# EAGLE board E-Piano-SM (EAGLE 9.4.0)
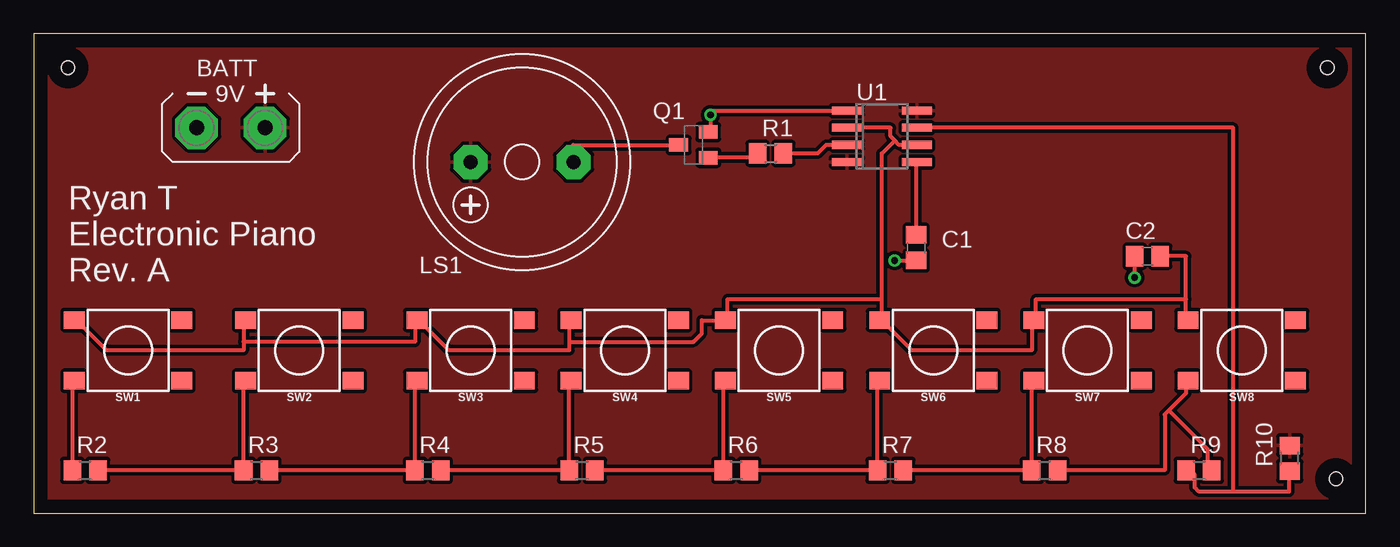
[diagram p0: board, top side]
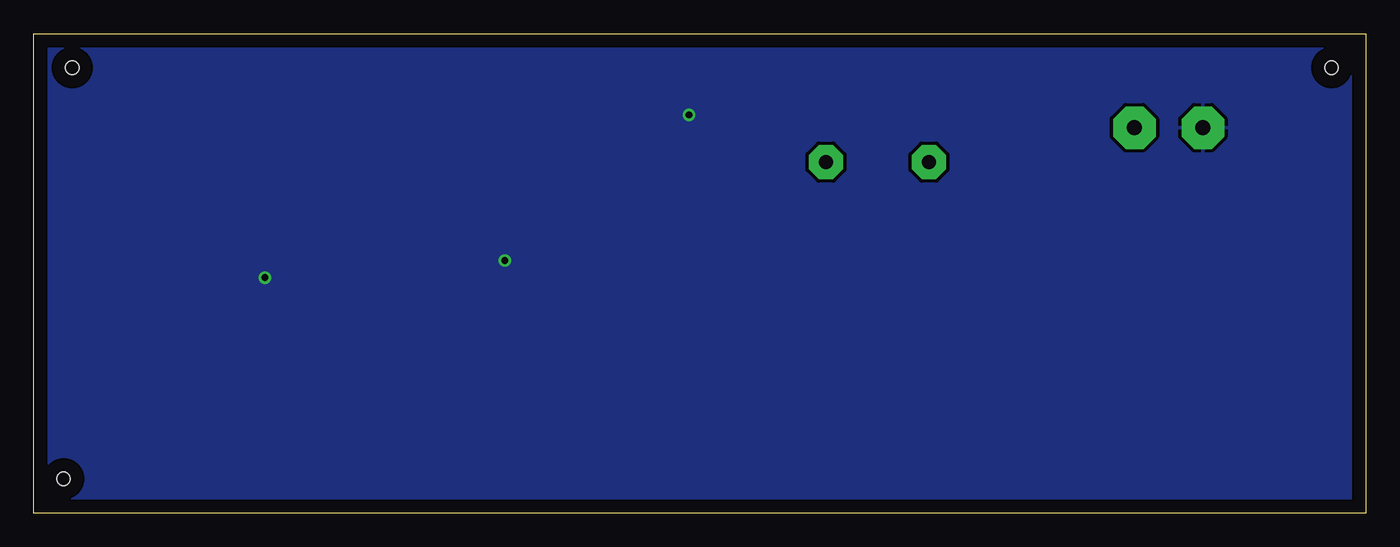
[diagram p1: board, bottom side, seen from below]

Size 98.73 x 35.55 mm. Coordinates in mm from the lower left corner, seen from the top.
Outline: 0,0 98.73,0 98.73,35.55 0,35.55 0,0
Copper layers (1*16): Top 0.035mm / dielectric 1.5mm / Bottom 0.035mm
Design rules "default": minimum track width 6mil, minimum drill 0.35mm, track to track 6mil, track to pad 6mil, pad to pad 6mil, via to via 6mil, smd to smd 6mil, copper to edge 40mil, drill to drill 6mil, minimum pad ring 10mil, minimum via ring 8mil, stop-mask expansion 4mil, vias tented up to drill 0mil, thermal gap 10mil
Net classes: 0 default: width 0.305 mm, drill 0.508 mm, clearance 0.254 mm
Holes 1 mm at 2.54,33.02 96.52,2.54 95.89,33.02

## Footprints (pad centres in the part's own frame; a part is rotated, then mirrored left to right if it is on the bottom)
AB9V = drill 1.118 pad 3.15 octagon: + 0,2.54; - 0,-2.54
C0805 = smd 1.3 x 1.5: 1 -0.95,0; 2 0.95,0
F/HMB = drill 1.016 pad 2.54 octagon: + 3.81,0; - -3.81,0
SOT23-BEC = smd 1 x 1.4: B -0.95,-1.1; C 0,1.1; E 0.95,-1.1
R0805 = smd 1.3 x 1.5: 1 -0.95,0; 2 0.95,0
TACTILE_SWITCH_SMD_6.2MM_TALL = smd 1.55 x 1.3: A1 -3.975,-2.25; A2 3.975,-2.25; B1 -3.975,2.25; B2 3.975,2.25
SO08 = smd 0.6 x 2.2: 1 -1.905,-2.6; 2 -0.635,-2.6; 3 0.635,-2.6; 4 1.905,-2.6; 5 1.905,2.6; 6 0.635,2.6; 7 -0.635,2.6; 8 -1.905,2.6

## Placement (x,y rotation side)
BATT  AB9V  [AB9V]  14.61,28.57 270 top
C1  0.1uF  [C0805]  65.41,19.68 270 top
C2  0.1uF  [C0805]  82.55,19.05 180 top
LS1  [F/HMB]  36.2,26.04 180 top
Q1  BCW66  [SOT23-BEC]  48.9,27.3 90 top
R1  3K  [R0805]  54.61,26.67 0 top
R2  1.5K  [R0805]  3.81,3.17 0 top
R3  1.3K  [R0805]  16.51,3.17 0 top
R4  620  [R0805]  29.21,3.17 0 top
R5  1.1K  [R0805]  40.64,3.17 0 top
R6  1K  [R0805]  52.07,3.17 0 top
R7  910  [R0805]  63.5,3.17 0 top
R8  390  [R0805]  74.93,3.17 0 top
R9  6.2K  [R0805]  86.36,3.17 0 top
R10  1K  [R0805]  93.09,4.06 90 top
SW1  MOMENTARY-SWITCH-SPST-SMD-6.2MM-TALL  [TACTILE_SWITCH_SMD_6.2MM_TALL]  6.99,12.06 180 top
SW2  MOMENTARY-SWITCH-SPST-SMD-6.2MM-TALL  [TACTILE_SWITCH_SMD_6.2MM_TALL]  19.68,12.06 180 top
SW3  MOMENTARY-SWITCH-SPST-SMD-6.2MM-TALL  [TACTILE_SWITCH_SMD_6.2MM_TALL]  32.38,12.06 180 top
SW4  MOMENTARY-SWITCH-SPST-SMD-6.2MM-TALL  [TACTILE_SWITCH_SMD_6.2MM_TALL]  43.81,12.06 180 top
SW5  MOMENTARY-SWITCH-SPST-SMD-6.2MM-TALL  [TACTILE_SWITCH_SMD_6.2MM_TALL]  55.24,12.06 180 top
SW6  MOMENTARY-SWITCH-SPST-SMD-6.2MM-TALL  [TACTILE_SWITCH_SMD_6.2MM_TALL]  66.67,12.06 180 top
SW7  MOMENTARY-SWITCH-SPST-SMD-6.2MM-TALL  [TACTILE_SWITCH_SMD_6.2MM_TALL]  78.11,12.06 180 top
SW8  MOMENTARY-SWITCH-SPST-SMD-6.2MM-TALL  [TACTILE_SWITCH_SMD_6.2MM_TALL]  89.53,12.06 180 top
U1  NE555D  [SO08]  62.87,27.94 270 top

## Library data of the parts
BATT = battery; MOUSER#: 534-81-8TB; MPN: 81-8; OC_NEWARK: unknown
C1 C2 = rcl; MOUSER#: 603-CC805JRX7R9BB104; MPN: CC805JRX7R9BB104; OC_NEWARK: unknown; SPICEPREFIX: C
LS1 = buzzer; MOUSER#: 665-AST-01508MR-R; OC_FARNELL: unknown; OC_NEWARK: unknown
Q1 = transistor; MF: FAIRCHILD SEMICONDUCTOR; MOUSER#: 726-BCW66KHE6327HTSA; MPN: PN2222ATF; OC_NEWARK: 58K2048
R1 R6 R10 = rcl; MOUSER#: 652-CR0805FX-1001ELF; OC_NEWARK: unknown; SPICEPREFIX: R
R2 = rcl; MOUSER#: 652-CR0805FX-1501ELF; OC_NEWARK: unknown; SPICEPREFIX: R
R3 = rcl; MOUSER#: 652-CR0805JW-132ELF; OC_NEWARK: unknown; SPICEPREFIX: R
R4 = rcl; MOUSER#: 652-CR0805JW-621ELF; OC_NEWARK: unknown; SPICEPREFIX: R
R5 = rcl; MOUSER#: 652-CR0805FX-1101ELF; OC_NEWARK: unknown; SPICEPREFIX: R
R7 = rcl; MOUSER#: 652-CR0805FX-9100ELF; OC_NEWARK: unknown; SPICEPREFIX: R
R8 = rcl; MOUSER#: 652-CR0805JW-391ELF; OC_NEWARK: unknown; SPICEPREFIX: R
R9 = rcl; MOUSER#: 652-CR0805FX-6201ELF; OC_NEWARK: unknown; SPICEPREFIX: R
SW1-SW8 = SparkFun-Switches; MOUSER#: 693-1301.9317; MPN: 1301.9317; OC_NEWARK: unknown; PROD_ID: SWCH-11966; SF_SKU: COM-12992
U1 = linear; MOUSER#: 595-TLC555CDR; OC_NEWARK: unknown

## Nets
0: BATT.- C1.2 C2.2 Q1.E U1.1
N$1: R8.2 R9.2 SW8.B2
N$2: R9.1 R10.1 U1.7
N$3: R2.1 SW1.B2
N$4: R7.2 R8.1 SW7.B2
N$5: R6.2 R7.1 SW6.B2
N$6: R5.2 R6.1 SW5.B2
N$7: R4.2 R5.1 SW4.B2
N$8: R3.2 R4.1 SW3.B2
N$9: R2.2 R3.1 SW2.B2
N$11: R1.2 U1.3
N$12: C1.1 U1.5
N$13: LS1.- Q1.C
N$14: Q1.B R1.1
TR: C2.1 SW1.A2 SW2.A2 SW3.A2 SW4.A2 SW5.A2 SW6.A2 SW7.A2 SW8.A2 U1.2 U1.6
VCC: BATT.+ LS1.+ R10.2 U1.4 U1.8

## Tracks (layer width: path | path; a pad name or v marks a point on that pad's centre or on a via)
0  (via drill 0.51)
  Top 0.305: Q1.E 50.16,28.26 v50.16,29.53 50.16,29.84 U1.1 | v63.82,18.73 C1.2 | v81.6,17.46 C2.2
  pour Bottom: -0.64,-0.64 100.33,-0.64 100.33,36.2 -0.64,36.2
N$1
  Top 0.305: R8.2 83.82,3.17 83.82,7.3 84.14,7.62 | 84.14,7.62 85.41,8.89 85.41,9.53 SW8.B2 | 84.14,7.62 87,4.76 87,3.17 R9.2
N$2
  Top 0.305: 88.9,1.59 93.03,1.59 93.03,2.86 R10.1 | 88.9,1.59 86.36,1.59 86.04,1.91 86.04,2.86 85.72,3.17 R9.1 | U1.7 88.9,28.57 88.9,1.59
N$3
  Top 0.305: R2.1 2.86,9.53 SW1.B2
N$4
  Top 0.305: R8.1 R7.2 | R8.1 73.98,9.53 SW7.B2 | R8.1
N$5
  Top 0.305: R7.1 R6.2 | R7.1 62.55,9.53 SW6.B2 | R7.1
N$6
  Top 0.305: R6.1 R5.2 | R6.1 51.12,9.53 SW5.B2 | R6.1
N$7
  Top 0.305: R5.1 R4.2 | R5.1 39.69,9.53 SW4.B2 | R5.1
N$8
  Top 0.305: R4.1 R3.2 | R4.1 28.26,9.53 SW3.B2 | R4.1
N$9
  Top 0.305: R3.1 R2.2 | R3.1 15.56,9.53 SW2.B2 | R3.1
N$11
  Top 0.305: R1.2 58.1,26.67 58.74,27.3 U1.3
N$12
  Top 0.305: C1.1 65.41,26.04 U1.5
N$13
  Top 0.305: Q1.C 40.01,27.3 LS1.-
N$14
  Top 0.305: Q1.B 50.16,26.35 53.66,26.35 R1.1
TR
  Top 0.305: U1.2 63.5,28.57 63.5,27.94 63.82,27.62 | 63.82,27.62 64.14,27.3 U1.6 | C2.1 85.41,19.05 85.41,15.88 | 85.41,15.88 85.41,14.61 SW8.A2 | 85.41,15.88 74.3,15.88 74.3,14.61 SW7.A2 73.98,14.29 73.98,12.06 65.09,12.06 62.87,14.29 SW6.A2 62.87,14.61 62.87,15.88 | 63.82,27.62 62.87,26.67 62.87,15.88 | 15.56,12.7 15.56,14.29 SW2.A2 | 15.56,12.7 15.56,12.06 5.4,12.06 3.17,14.29 SW1.A2 | 39.69,12.7 39.69,14.29 SW4.A2 | 39.69,12.7 39.69,12.06 30.8,12.06 28.57,14.29 SW3.A2 28.26,14.29 28.26,12.7 15.56,12.7 | 39.69,12.7 48.9,12.7 49.53,13.34 49.53,14.29 51.12,14.29 SW5.A2 51.44,14.61 51.44,15.88 62.87,15.88
VCC
  pour Top: -1.27,-0.64 99.69,-0.64 100.33,0 100.33,35.56 98.42,37.47 0,37.47 -1.27,36.2

## Text on the board
tPlace: Ryan T / Electronic Piano / Rev. A